# EAGLE board Lamp Logic Board_22 Power 2 (EAGLE 9.5.1)
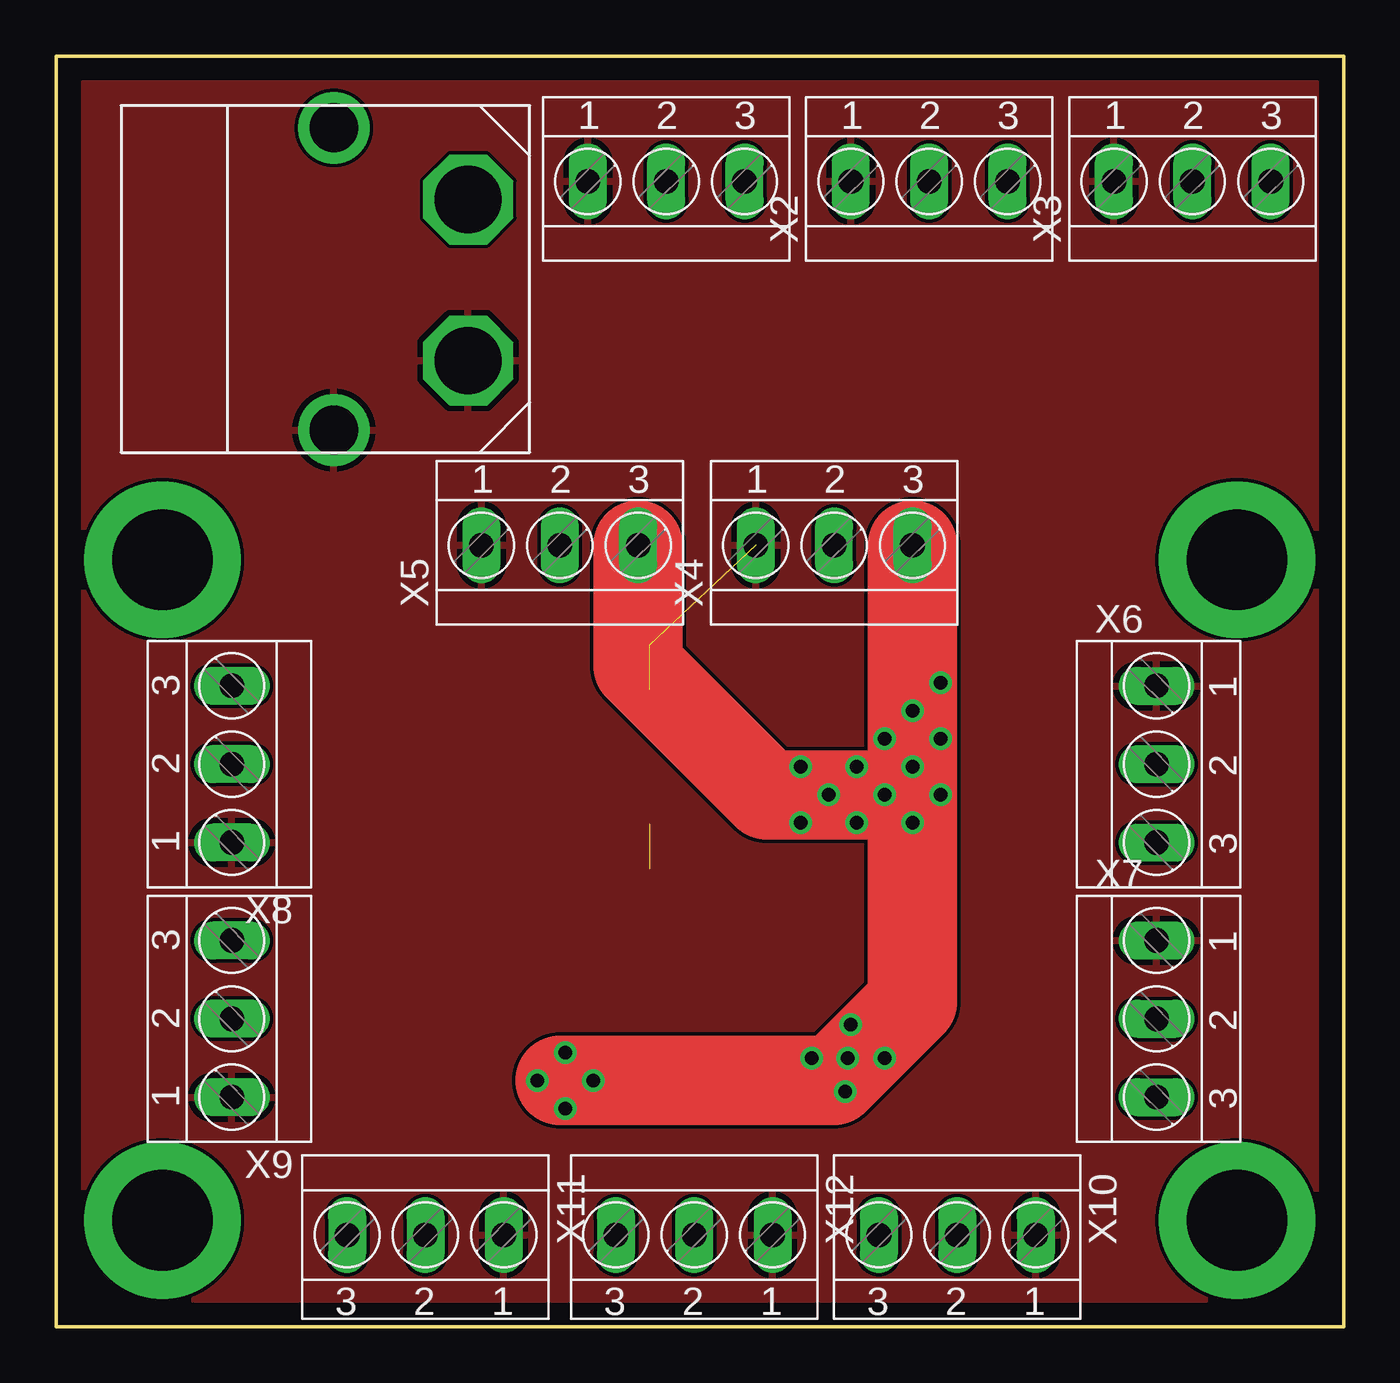
[diagram p0: board, top side]
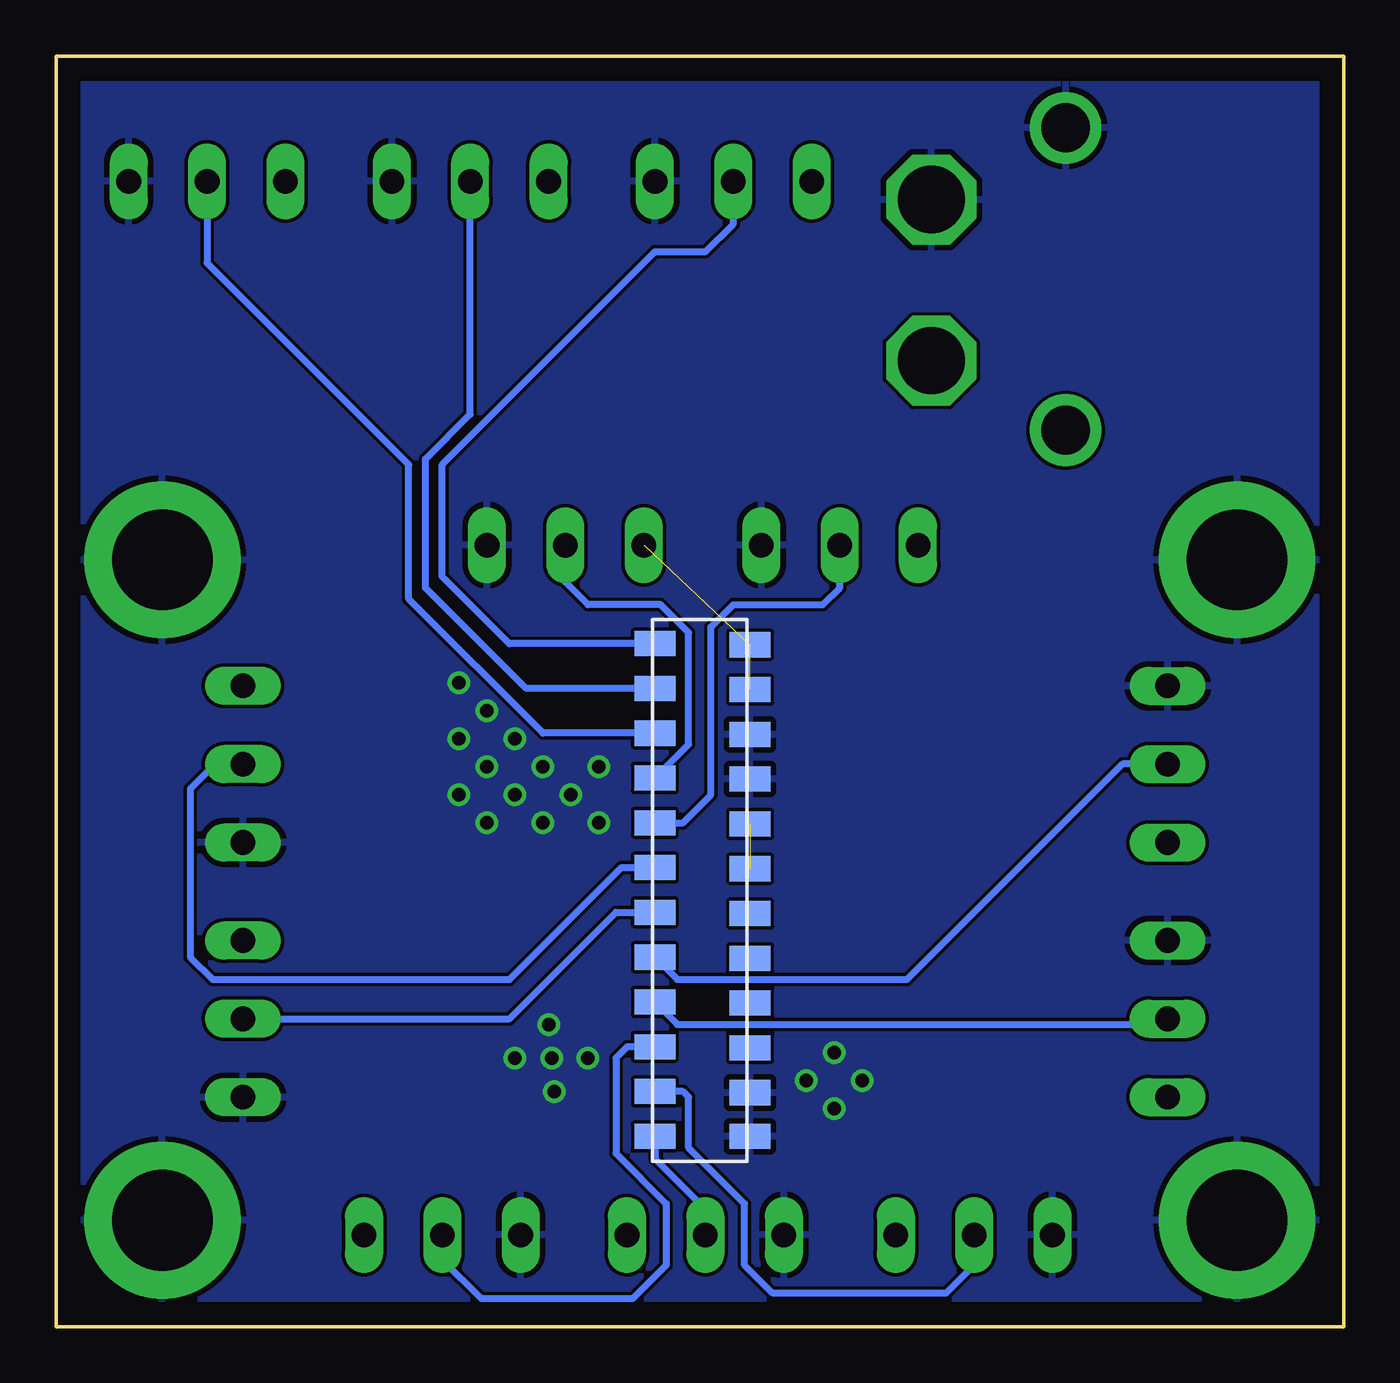
[diagram p1: board, bottom side, seen from below]

Size 57.5 x 56.75 mm. Coordinates in mm from the lower left corner, seen from the top.
Outline: 57.5,0 57.5,56.75 0,56.75 0,0 57.5,0
Copper layers (1*16): Top 0.035mm / dielectric 1.5mm / Bottom 0.035mm
Design rules "default": minimum track width 6mil, minimum drill 0.35mm, track to track 6mil, track to pad 6mil, pad to pad 6mil, via to via 6mil, smd to smd 6mil, copper to edge 40mil, drill to drill 6mil, minimum pad ring 10mil, minimum via ring 8mil, stop-mask expansion 4mil, vias tented up to drill 0mil, thermal gap 10mil

## Footprints (pad centres in the part's own frame; a part is rotated, then mirrored left to right if it is on the bottom)
4,PIECE = drill 4.5 pad 7: P$1 0,0; P$2 48,29.5; P$3 0,29.5; P$4 48,0
MY_HEADER = smd 1.12 x 1.83: P$1 -2,0; P$2 0.005,0; P$3 2.005,0; P$4 4.005,0; P$5 6.005,0; P$6 8.005,0; P$7 10.005,0; P$8 12.005,0; P$9 14.005,0; P$10 16.005,0; P$11 18.005,0; P$12 20.005,0; P$13 -2,-4.25; P$14 -0.045,-4.25; P$15 1.955,-4.25; P$16 3.955,-4.25; P$17 5.955,-4.25; P$18 7.955,-4.25; P$19 9.955,-4.25; P$20 11.955,-4.25; P$21 13.955,-4.25; P$22 15.955,-4.25; P$23 17.955,-4.25; P$24 19.955,-4.25
XT60 = drill 3 octagon: + 4.1,2.75; - 11.3,2.75 | drill 2.184 pad 2.438: +_HOLE 1,8.75 | drill 2.184 pad 2.413: -_HOLE 14.5,8.75
TERMINAL-BLOCK-3-PIN-3.5MM-LONG-PAD = drill 1.1 pad 1.7 long: 1 -3.5,-0.1; 2 0,-0.1; 3 3.5,-0.1

## Placement (x,y rotation side)
U$1  POWERBOARD_TEMPLATEPOWERBOARD_TEMPLATE  [4,PIECE]  4.75,4.75 0 top
U$2  MY_HEADER  [MY_HEADER]  30.75,10.5 90 bottom
U$3  XT60  [XT60]  21.16,39.04 90 top
X1  TERMINAL-BLOCK-3.5MM-3-PIN-LONG-PAD  [TERMINAL-BLOCK-3-PIN-3.5MM-LONG-PAD]  27.25,51.25 0 top
X2  TERMINAL-BLOCK-3.5MM-3-PIN-LONG-PAD  [TERMINAL-BLOCK-3-PIN-3.5MM-LONG-PAD]  39,51.25 0 top
X3  TERMINAL-BLOCK-3.5MM-3-PIN-LONG-PAD  [TERMINAL-BLOCK-3-PIN-3.5MM-LONG-PAD]  50.75,51.25 0 top
X4  TERMINAL-BLOCK-3.5MM-3-PIN-LONG-PAD  [TERMINAL-BLOCK-3-PIN-3.5MM-LONG-PAD]  34.75,35 0 top
X5  TERMINAL-BLOCK-3.5MM-3-PIN-LONG-PAD  [TERMINAL-BLOCK-3-PIN-3.5MM-LONG-PAD]  22.5,35 0 top
X6  TERMINAL-BLOCK-3.5MM-3-PIN-LONG-PAD  [TERMINAL-BLOCK-3-PIN-3.5MM-LONG-PAD]  49.25,25.12 270 top
X7  TERMINAL-BLOCK-3.5MM-3-PIN-LONG-PAD  [TERMINAL-BLOCK-3-PIN-3.5MM-LONG-PAD]  49.25,13.75 270 top
X8  TERMINAL-BLOCK-3.5MM-3-PIN-LONG-PAD  [TERMINAL-BLOCK-3-PIN-3.5MM-LONG-PAD]  7.75,25.12 90 top
X9  TERMINAL-BLOCK-3.5MM-3-PIN-LONG-PAD  [TERMINAL-BLOCK-3-PIN-3.5MM-LONG-PAD]  7.75,13.75 90 top
X10  TERMINAL-BLOCK-3.5MM-3-PIN-LONG-PAD  [TERMINAL-BLOCK-3-PIN-3.5MM-LONG-PAD]  40.25,4 180 top
X11  TERMINAL-BLOCK-3.5MM-3-PIN-LONG-PAD  [TERMINAL-BLOCK-3-PIN-3.5MM-LONG-PAD]  16.5,4 180 top
X12  TERMINAL-BLOCK-3.5MM-3-PIN-LONG-PAD  [TERMINAL-BLOCK-3-PIN-3.5MM-LONG-PAD]  28.5,4 180 top

## Library data of the parts
U$1 = QUICKFIT_RISER_THING
U$2 = MY_HEADER
U$3 = XT60
X1-X12 = Rembrandt Electronics - Terminal Block 3-5mm v1-0

## Nets
GND: U$1.P$1 U$1.P$2 U$1.P$3 U$1.P$4 U$2.P$13 U$2.P$14 U$2.P$21 U$2.P$22 U$3.- U$3.-_HOLE X1.3 X2.3 X3.3 X4.3 X5.3 X6.3 X7.3 X8.3 X9.3 X10.3 X11.3 X12.3
HEADER_CS: U$2.P$15
LEDS1_5V: U$2.P$12 X1.2
LEDS2_5V: U$2.P$11 X2.2
LEDS3_5V: U$2.P$10 X3.2
LEDS4_5V: U$2.P$9 X4.2
LEDS5_5V: U$2.P$8 X5.2
LEDS6_5V: U$2.P$7 X6.2
LEDS7_5V: U$2.P$6 X7.2
LEDS8_5V: U$2.P$5 X8.2
LEDS9_5V: U$2.P$4 X9.2
LEDS10_5V: U$2.P$3 X10.2
LEDS11_5V: U$2.P$2 X11.2
LEDS12_5V: U$2.P$1 X12.2
MISO: U$2.P$18
MOSI: U$2.P$17
SCK: U$2.P$16
VDD3V3: U$2.P$19 U$2.P$20
VDD5V: U$2.P$23 U$2.P$24 U$3.+ U$3.+_HOLE X1.1 X2.1 X3.1 X4.1 X5.1 X6.1 X7.1 X8.1 X9.1 X10.1 X11.1 X12.1

## Tracks (layer width: path | path; a pad name or v marks a point on that pad's centre or on a via)
GND  (via drill 0.6)
  Top 4: X4.3 38.25,33 v38.25,27.5 v38.25,25 | v38.25,25 38.25,23.75 v37,23.75 31.75,23.75 26,29.5 X5.3 | v38.25,25 38.25,14.5 34.75,11 22.5,11
  other vias: 39.5,28.75 39.5,26.25 39.5,23.75 38.25,22.5 37,26.25 35.75,25 34.5,23.75 33.25,25 33.25,22.5 35.75,22.5 21.5,11 22.75,12.25 22.75,9.75 24,11 33.75,12 35.5,13.5 37,12 35.25,10.5 35.36,11.99
  pour Bottom: 0,56.75 57.5,56.75 57.5,0 0,0
LEDS1_5V
  Bottom 0.305: U$2.P$12 37.26,30.5 40.25,33.5 40.25,38.5 30.75,48 28.5,48 27.25,49.25 X1.2
LEDS2_5V
  Bottom 0.305: U$2.P$11 36.5,28.5 41,33 41,38.75 39,40.75 X2.2
LEDS3_5V
  Bottom 0.305: U$2.P$10 35.75,26.5 41.75,32.5 41.75,38.5 50.75,47.5 X3.2
LEDS4_5V
  Bottom 0.305: U$2.P$9 29.25,26 29.25,31 30.5,32.25 33.75,32.25 34.75,33.25 X4.2
LEDS5_5V
  Bottom 0.305: U$2.P$8 29.5,22.5 28.25,23.75 28.25,31.25 27.25,32.25 23.25,32.25 22.5,33 X5.2
LEDS6_5V
  Bottom 0.305: X6.2 50.4,25.12 51.5,24.02 51.5,16.5 50.5,15.5 37.25,15.5 32.25,20.51 U$2.P$7
LEDS7_5V
  Bottom 0.305: X7.2 37.25,13.75 32.5,18.51 U$2.P$6
LEDS8_5V
  Bottom 0.305: U$2.P$5 29.75,15.5 19.5,15.5 9.88,25.12 X8.2
LEDS9_5V
  Bottom 0.305: U$2.P$4 29.75,13.5 8.1,13.5 X9.2
LEDS10_5V
  Bottom 0.305: U$2.P$3 32,12.5 32.5,12 32.5,7.75 30.25,5.5 30.25,2.75 31.75,1.25 38.5,1.25 40.25,3 X10.2
LEDS11_5V
  Bottom 0.305: X11.2 16.5,2.75 17.75,1.5 25.5,1.5 26.75,2.75 26.75,5.5 29.25,8 29.25,10.25 29.5,10.5 U$2.P$2
LEDS12_5V
  Bottom 0.305: U$2.P$1 30.75,7.5 28.5,5.25 X12.2
VDD3V3  (1 unrouted)
VDD5V  (2 unrouted)
  pour Top: 0,56.75 57.5,56.75 57.5,0 0,0
(copper drawn outside any net)
  shapes: Top area x1